# Allegro board DA CONVERTOR.brd
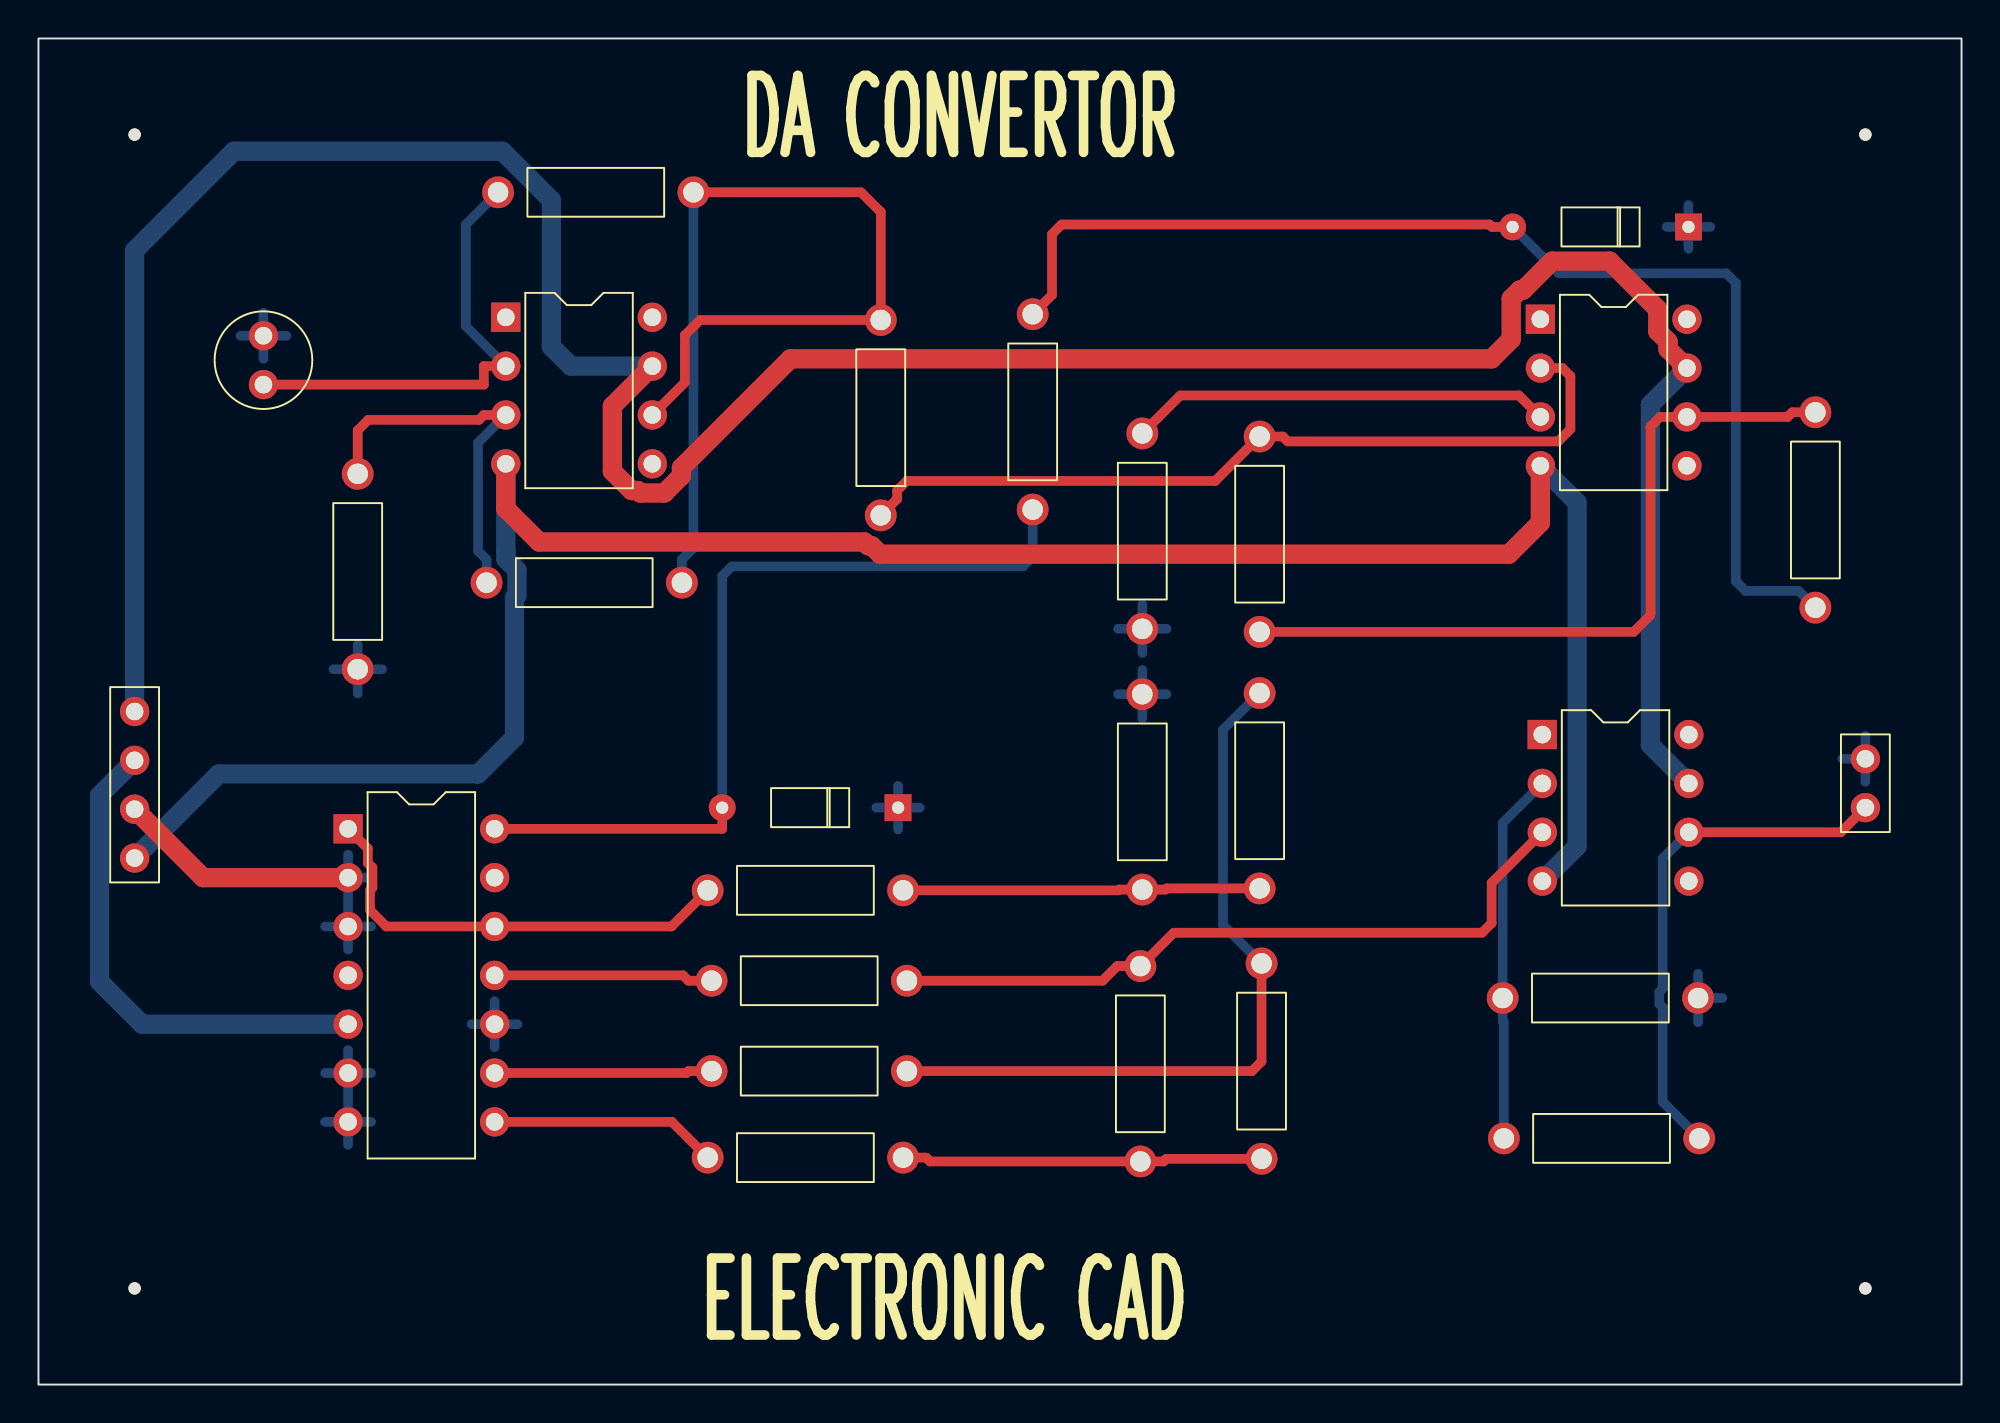
[diagram p0: board, top side]
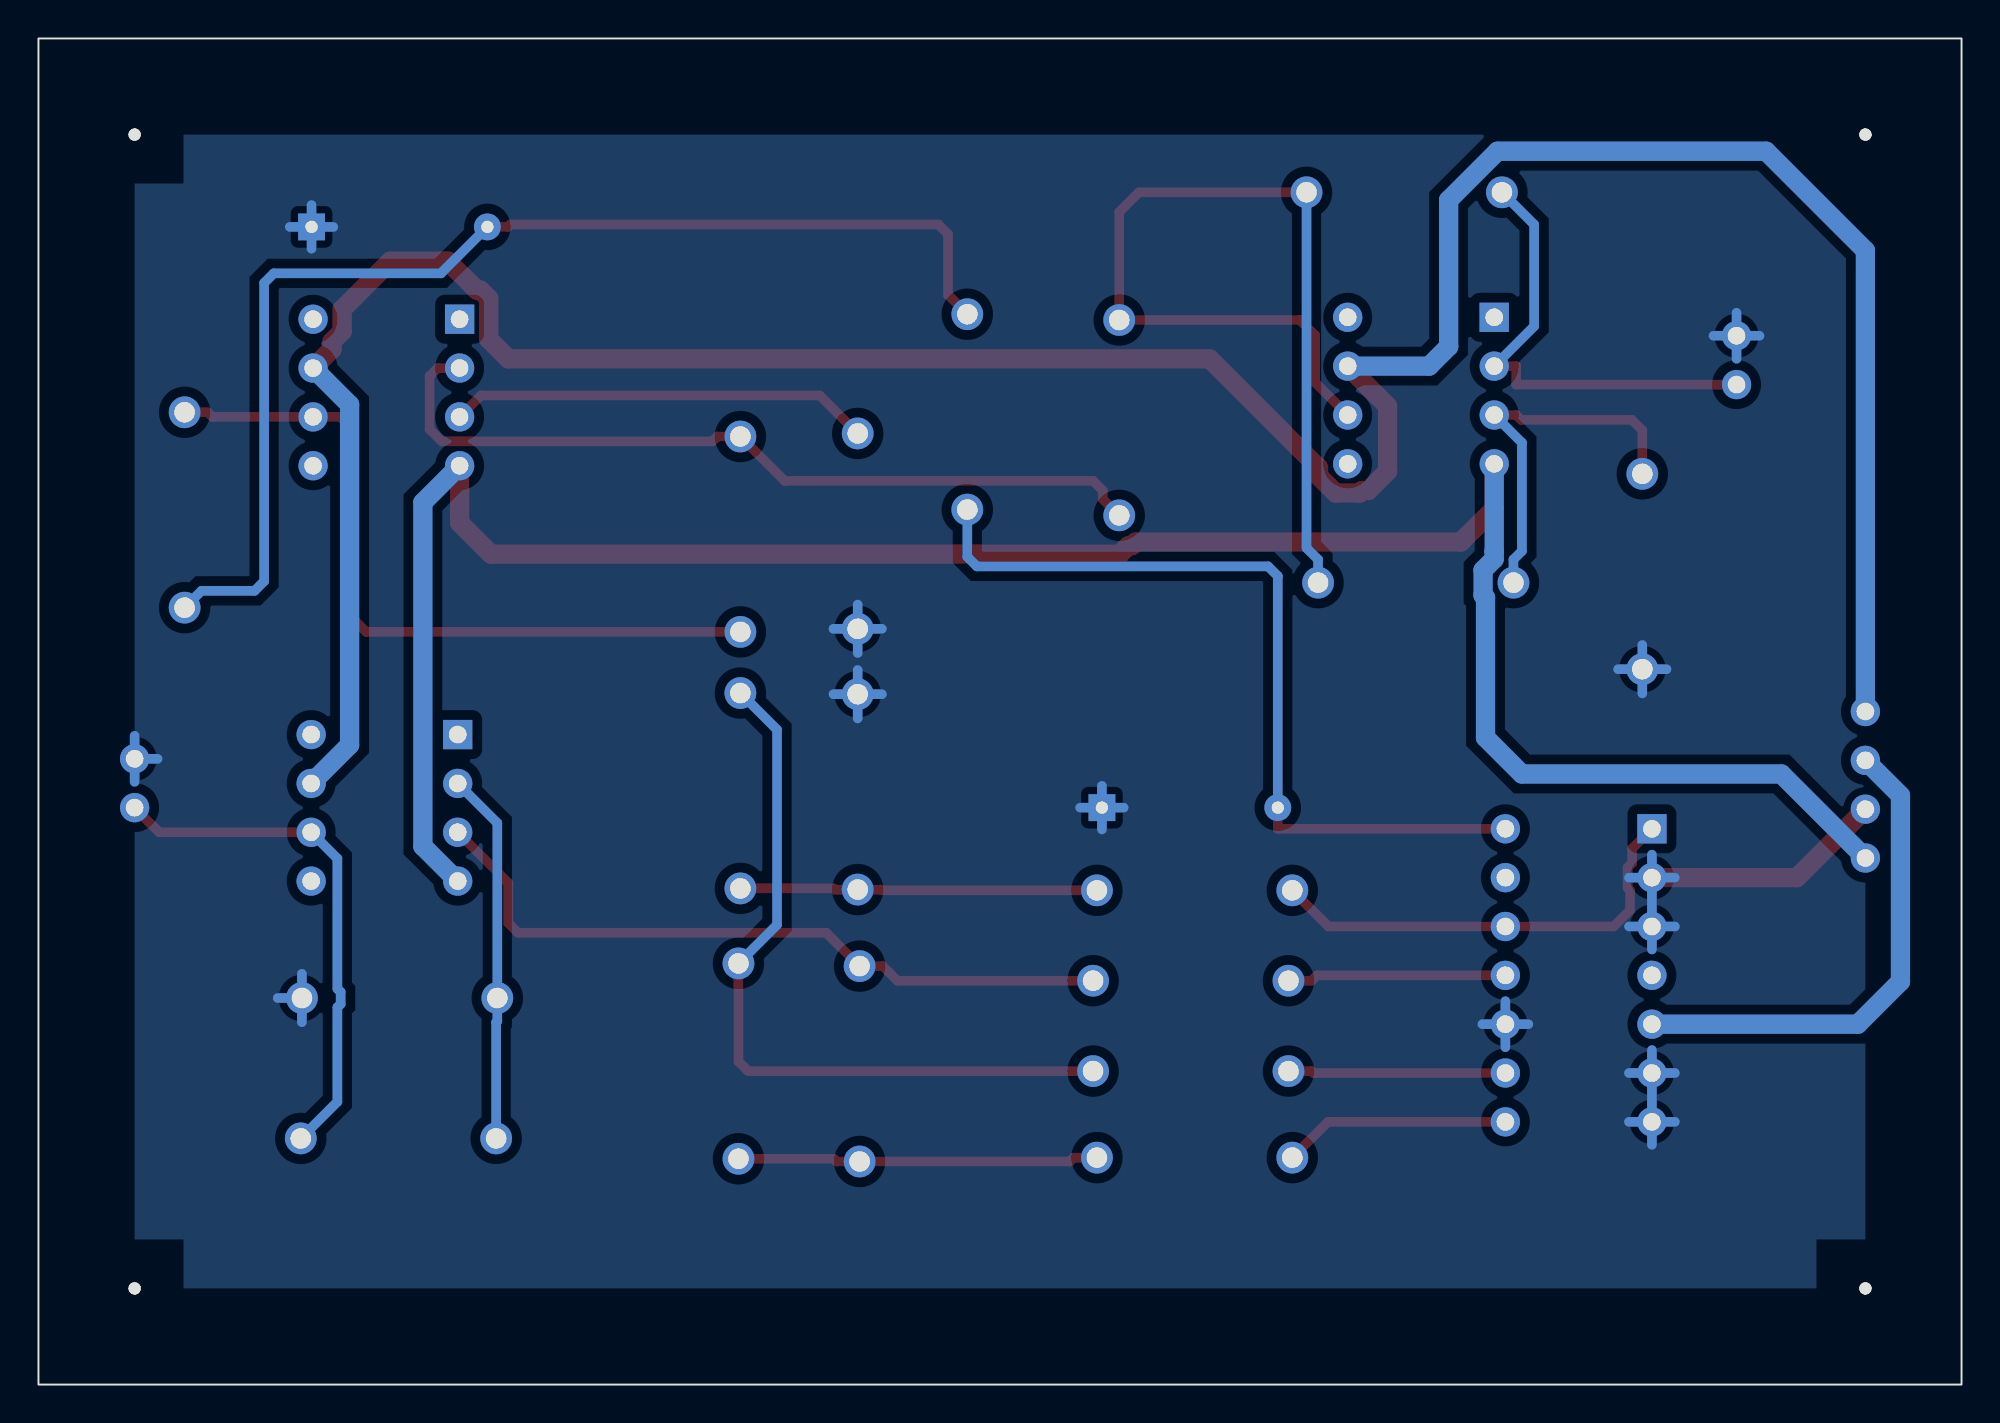
[diagram p1: board, bottom side, seen from below]

Outline 100 x 70 mm; copper layers: TOP, BOTTOM. Coordinates in mm from the lower left corner of the outline.
Outline path: rectangle 0,0 100,70

## Design rules (mm)
constraint set DEFAULT: min track width 0.5, pair gap 0.5
net group POWERWORKS: nets +5V +12V -12V

## Placement (name value [footprint] x y rotation side)
C1  0.1uF  [CAP196]  11.7 52 0 top
D1  D1N4148/TEMP  [DO35]  85.8 60.2 90 top
D2  RD56EB  [DO35]  44.7 30 90 top
J1  CON4  [JUMPER4]  5 35 270 top
J2  CON2  [JUMPER2]  95 30 90 top
NOREF  -  []  100 0 90 top
NOREF#2  -  [unnamed#2]  95 5 0 top
NOREF#3  -  [unnamed#2]  5 65 0 top
NOREF#4  -  [unnamed#2]  5 5 0 top
NOREF#5  -  [unnamed#2]  95 65 0 top
NOREF#6  -  []  0 70 0 top
R1  10k  [RES400]  23.9 62 270 top
R2  6.8k  [RES400]  23.3 41.7 270 top
R3  1k  [RES400]  16.6 37.2 0 top
R4  10k  [RES400]  43.8 45.2 0 top
R5  5.1k  [RES400]  63.5 49.3 180 top
R6  10k  [RES400]  57.4 39.3 0 top
R7  1k  [RES400]  92.4 40.4 0 top
R8  1k  [RES400]  51.7 45.5 0 top
R9  22k  [RES400]  35 21 270 top
R10  22k  [RES400]  34.8 11.8 270 top
R11  22k  [RES400]  35 16.3 270 top
R12  22k  [RES400]  34.8 25.7 270 top
R13  10k  [RES400]  57.3 11.6 0 top
R14  10k  [RES400]  63.6 21.9 180 top
R15  10k  [RES400]  63.5 25.8 0 top
R16  10k  [RES400]  57.4 35.9 180 top
R17  22k  [RES400]  76.2 12.8 270 top
R18  10k  [RES400]  86.3 20.1 90 top
U1  LM741  [DIP8_3]  24.3 55.5 0 top
U2  LM741  [DIP8_3]  78.1 55.4 0 top
U3  74LS90  [DIP14_3]  16.1 28.9 0 top
U4  LM741  [DIP8_3]  78.2 33.8 0 top

## Library data of the parts
C1 = CAP NP: Tolerance: ***; User Part Number: ***
D1 = D1N4148/TEMP
D2 = RD56EB
J1 = CON4: User Part Number: ***
J2 = CON2: User Part Number: ***
R1-R18 = R: Tolerance: ***; User Part Number: ***
U1 U2 U4 = LM741: Tolerance: ***; User Part Number: ***
U3 = 74LS90_0: Tolerance: ***; User Part Number: ***

## Footprints (pads in the part's own frame, mm; a bottom-side part is the same pattern mirrored in y, then rotated)
CAP196
  round 1.524 hole 0.914: 1(0,0) 2(0,2.54)
DIP8_3
  rect 1.524x1.524 hole 0.914: 1(0,0)
  round 1.524 hole 0.914: 2(0,-2.54) 3(0,-5.08) 4(0,-7.62) 5(7.62,-7.62) 6(7.62,-5.08) 7(7.62,-2.54) 8(7.62,0)
DIP14_3
  rect 1.524x1.524 hole 0.914: 1(0,0)
  round 1.524 hole 0.914: 2(0,-2.54) 3(0,-5.08) 4(0,-7.62) 5(0,-10.16) 6(0,-12.7) 7(0,-15.24) 8(7.62,-15.24) 9(7.62,-12.7) 10(7.62,-10.16) 11(7.62,-7.62) 12(7.62,-5.08) 13(7.62,-2.54) 14(7.62,0)
DO35
  rect 1.397x1.397 hole 0.635: 1(0,0)
  round 1.397 hole 0.635: 2(0,9.144)
JUMPER2
  round 1.524 hole 0.914: 1(0,0) 2(2.54,0)
JUMPER4
  round 1.524 hole 0.914: 1(0,0) 2(2.54,0) 3(5.08,0) 4(7.62,0)
RES400
  round 1.651 hole 1.067: 1(0,0) 2(0,10.16)
unnamed#2
  round 0.635 hole 3.175 unplated: (0,0)

## Nets
+5V: J1.2 U3.5
+12V: J1.1 U1.7 U2.7 U4.7
-12V: J1.4 U1.4(V-) U2.4(V-) U4.4(V-)
GND: C1.2 D1.1 D2.1 J1.3 J2.2 R3.1 R6.1 R16.1 R18.1 U3.2 U3.3 U3.6 U3.7(R92) U3.10
CLK: D2.2 R8.1 U3.14
OUT: J2.1 R17.2 U4.6
SIG: R9.2 R13.2 U4.3
N00320: C1.1 R1.1 U1.2
N00341: R2.1 R3.2 U1.3
N00359: R1.2 R2.2 R4.2 U1.6
N00390: R4.1 R5.1 U2.2
N00538: R5.2 R7.2 U2.6
N00559: R6.2 U2.3
N00572: D1.2 R7.1 R8.2
N01070: R12.1 U3.1 U3.12
N01268: R9.1 U3.11
N01275: R10.1 U3.8
N01282: R11.1 U3.9
N01305: R10.2 R13.1 R14.2
N01313: R12.2 R15.1 R16.2
N01322: R11.2 R14.1 R15.2
N02176: R17.1 R18.2 U4.2

Pads without a net: U1 1 5 8; U2 1 5 8; U3 4 13; U4 1 5 8

## Via types
v1: diameter 0.61, hole 0.33, TOP to BOTTOM, 2 vias

## Routing (per net, layer and track width the routed paths; a pad name or vN(x,y) marks a point on that pad's centre or on a via; arc(x,y) is an arc through that point)
+5V: length 26.1
  BOTTOM w1: U3.5 5.39,18.74 3.17,20.95 3.17,30.64 J1.2
+12V: length 157.7
  TOP w1: U2.7 84.74,53.84 84.74,54.24 84.2,54.77 84.2,55.92 81.7,58.42 78.71,58.42 77.2,56.92 77.03,56.92 76.58,56.48 76.58,54.36 75.56,53.34 39.1,53.34 33.44,47.68 33.44,47.25 32.55,46.36 31.29,46.36 31.16,46.49 30.84,46.49 29.84,47.49 29.84,50.88 U1.7
  BOTTOM w1: U2.7 83.82,50.96 83.82,33.26 U4.7 ; J1.1 5,58.98 10.16,64.14 24.13,64.14 26.67,61.59 26.67,53.98 27.68,52.96 U1.7
-12V: length 120.8
  TOP w1: U1.4 24.3,45.55 26.04,43.81 42.95,43.81 43.15,43.62 43.33,43.62 43.77,43.18 76.47,43.18 78.1,44.81 U2.4
  BOTTOM w1: U4.4 80.01,27.99 80.01,45.87 U2.4 ; U1.4 24.3,43.32 24.3,43.32 24.3,42.93 24.88,42.35 24.88,41.05 24.75,40.92 24.75,33.64 22.86,31.75 9.37,31.75 J1.4
GND: length 72.8
  TOP w1: J1.3 8.56,26.36 U3.2
  BOTTOM w0.5: 56.14,35.9 R16.1 ; R16.1 57.4,37.16 ; R16.1 58.66,35.9 ; R16.1 57.4,34.64 ; 14.9,26.36 U3.2 ; U3.2 17.3,26.36 ; U3.2 16.1,25.16 ; U3.2 16.1,27.56 ; C1.2 11.7,55.74 ; C1.2 12.9,54.54 ; C1.2 11.7,53.34 ; C1.2 10.5,54.54 ; 43.57,30 D2.1 ; D2.1 44.7,28.87 ; D2.1 45.83,30 ; D2.1 44.7,31.13 ; 84.67,60.2 D1.1 ; D1.1 85.8,61.33 ; D1.1 86.93,60.2 ; D1.1 85.8,59.07 ; 56.14,39.3 R6.1 ; R6.1 58.66,39.3 ; R6.1 57.4,40.56 ; R6.1 57.4,38.04 ; R18.1 87.56,20.1 ; R18.1 86.3,21.36 ; R18.1 86.3,18.84 ; J2.2 95,33.74 ; J2.2 93.8,32.54 ; J2.2 95,31.34 ; 14.9,16.2 U3.6 ; U3.6 16.1,17.4 ; U3.6 16.1,15 ; U3.6 17.3,16.2 ; 16.1,22.62 U3.3 ; U3.3 16.1,25.02 ; U3.3 14.9,23.82 ; U3.3 17.3,23.82 ; R3.1 17.86,37.2 ; R3.1 16.6,35.94 ; R3.1 16.6,38.46 ; R3.1 15.34,37.2 ; U3.7 17.3,13.66 ; U3.7 16.1,14.86 ; U3.7 14.9,13.66 ; U3.7 16.1,12.46 ; 22.52,18.74 U3.10 ; U3.10 24.92,18.74 ; U3.10 23.72,17.54 ; U3.10 23.72,19.94
CLK: length 44
  TOP w0.5: U3.14 35.56,28.9 D2.2
  BOTTOM w0.5: R8.1 51.7,43.05 51.2,42.55 36.06,42.55 35.56,42.05 D2.2
OUT: length 27.1
  TOP w0.5: J2.1 93.72,28.72 U4.6
  BOTTOM w0.5: R17.2 84.45,14.71 84.45,19.62 84.29,19.79 84.29,20.41 84.45,20.58 84.45,27.36 U4.6
SIG: length 37.5
  TOP w0.5: R9.2 55.34,21 56.1,21.76 R13.2 59.03,23.5 75.06,23.5 75.56,24 75.56,26.09 U4.3
N00320: length 24.2
  TOP w0.5: C1.1 23.16,52 23.16,52.96 U1.2
  BOTTOM w0.5: R1.1 22.23,60.33 22.23,55.03 U1.2
N00341: length 19.8
  TOP w0.5: U1.3 23.16,50.42 22.91,50.16 17.14,50.16 16.6,49.62 R3.2
  BOTTOM w0.5: R2.1 23.3,42.9 22.86,43.34 22.86,48.98 U1.3
N00359: length 51.7
  TOP w0.5: v1(34.06,62) 42.77,62 43.8,60.98 R4.2 34.41,55.36 33.61,54.57 33.61,52.11 U1.6
  BOTTOM w0.5: R2.2 33.46,42.9 34.06,43.5 v1(34.06,61.83) v1(34.06,62)
N00390: length 42.7
  TOP w0.5: U2.2 79.24,52.86 79.66,52.44 79.66,49.68 79.03,49.05 64.96,49.05 64.7,49.3 R5.1 61.19,46.99 45.15,46.99 44.65,46.49 44.65,46.05 R4.1
N00538: length 39.4
  TOP w0.5: R5.2 82.95,39.14 83.82,40.01 83.82,49.82 84.32,50.32 U2.6 90.96,50.32 91.2,50.56 R7.2
N00559: length 22
  TOP w0.5: R6.2 59.38,51.44 76.98,51.44 U2.3
N00572: length 61.8
  TOP w0.5: D1.2 75.58,60.2 75.45,60.33 53.2,60.33 52.7,59.83 52.7,56.66 R8.2
  BOTTOM w0.5: R7.1 91.53,41.27 88.77,41.27 88.27,41.77 88.27,57.28 87.77,57.78 79.07,57.78 D1.2
N01070: length 23.5
  TOP w0.5: R12.1 32.92,23.82 U3.12 18.09,23.82 17.24,24.67 17.24,25.71 17.37,25.84 17.37,26.89 17.13,27.12 17.13,27.87 U3.1
N01268: length 11.4
  TOP w0.5: U3.11 33.52,21.28 33.8,21 R9.1
N01275: length 11.9
  TOP w0.5: U3.8 32.94,13.66 R10.1
N01282: length 11.3
  TOP w0.5: R11.1 33.8,16.3 33.7,16.2 U3.9
N01305: length 18.8
  TOP w0.5: R14.2 58.64,11.74 58.5,11.6 R13.1 46.36,11.6 46.16,11.8 R10.2
N01313: length 18.6
  TOP w0.5: R12.2 56.16,25.7 56.2,25.74 R16.2 58.6,25.74 58.66,25.8 R15.1
N01322: length 39.4
  TOP w0.5: R11.2 63.1,16.3 63.6,16.8 R14.1
  BOTTOM w0.5: R15.2 61.59,34.05 61.59,23.91 R14.1
N02176: length 19.3
  BOTTOM w0.5: R17.1 76.2,18.84 76.14,18.9 R18.2 76.14,29.2 U4.2

## Copper pours and planes (outline as drawn; the poured copper is in the pictures)
GND on BOTTOM: 95,5 95,65 5,65 5,5 ; 3 cut-outs

## Text on the board
Ref Des/Silkscreen Top: ELECTRONIC CAD | DA CONVERTOR
DIMENSION: FIGURE | FINISHED_SIZE | 0.33 | 0.635 | 0.914 | 1.067 | 3.175 | DRILL CHART: TOP to BOTTOM | ALL UNITS ARE IN MILLIMETERS | PLATED | NON-PLATED | QTY | 2 | 4 | 46 | 36
